# Altium PCB PCB1.PcbDoc
Units mil, origin at the board's own origin, x right, y up, seen from the top; angles counter-clockwise.
Board outline 7070 x 4660 mil, 2 copper layers (Top Layer, Bottom Layer); 52 components, 19 nets, 300 pads, 0 vias.
Unrouted connection lines stored in the file: 39.
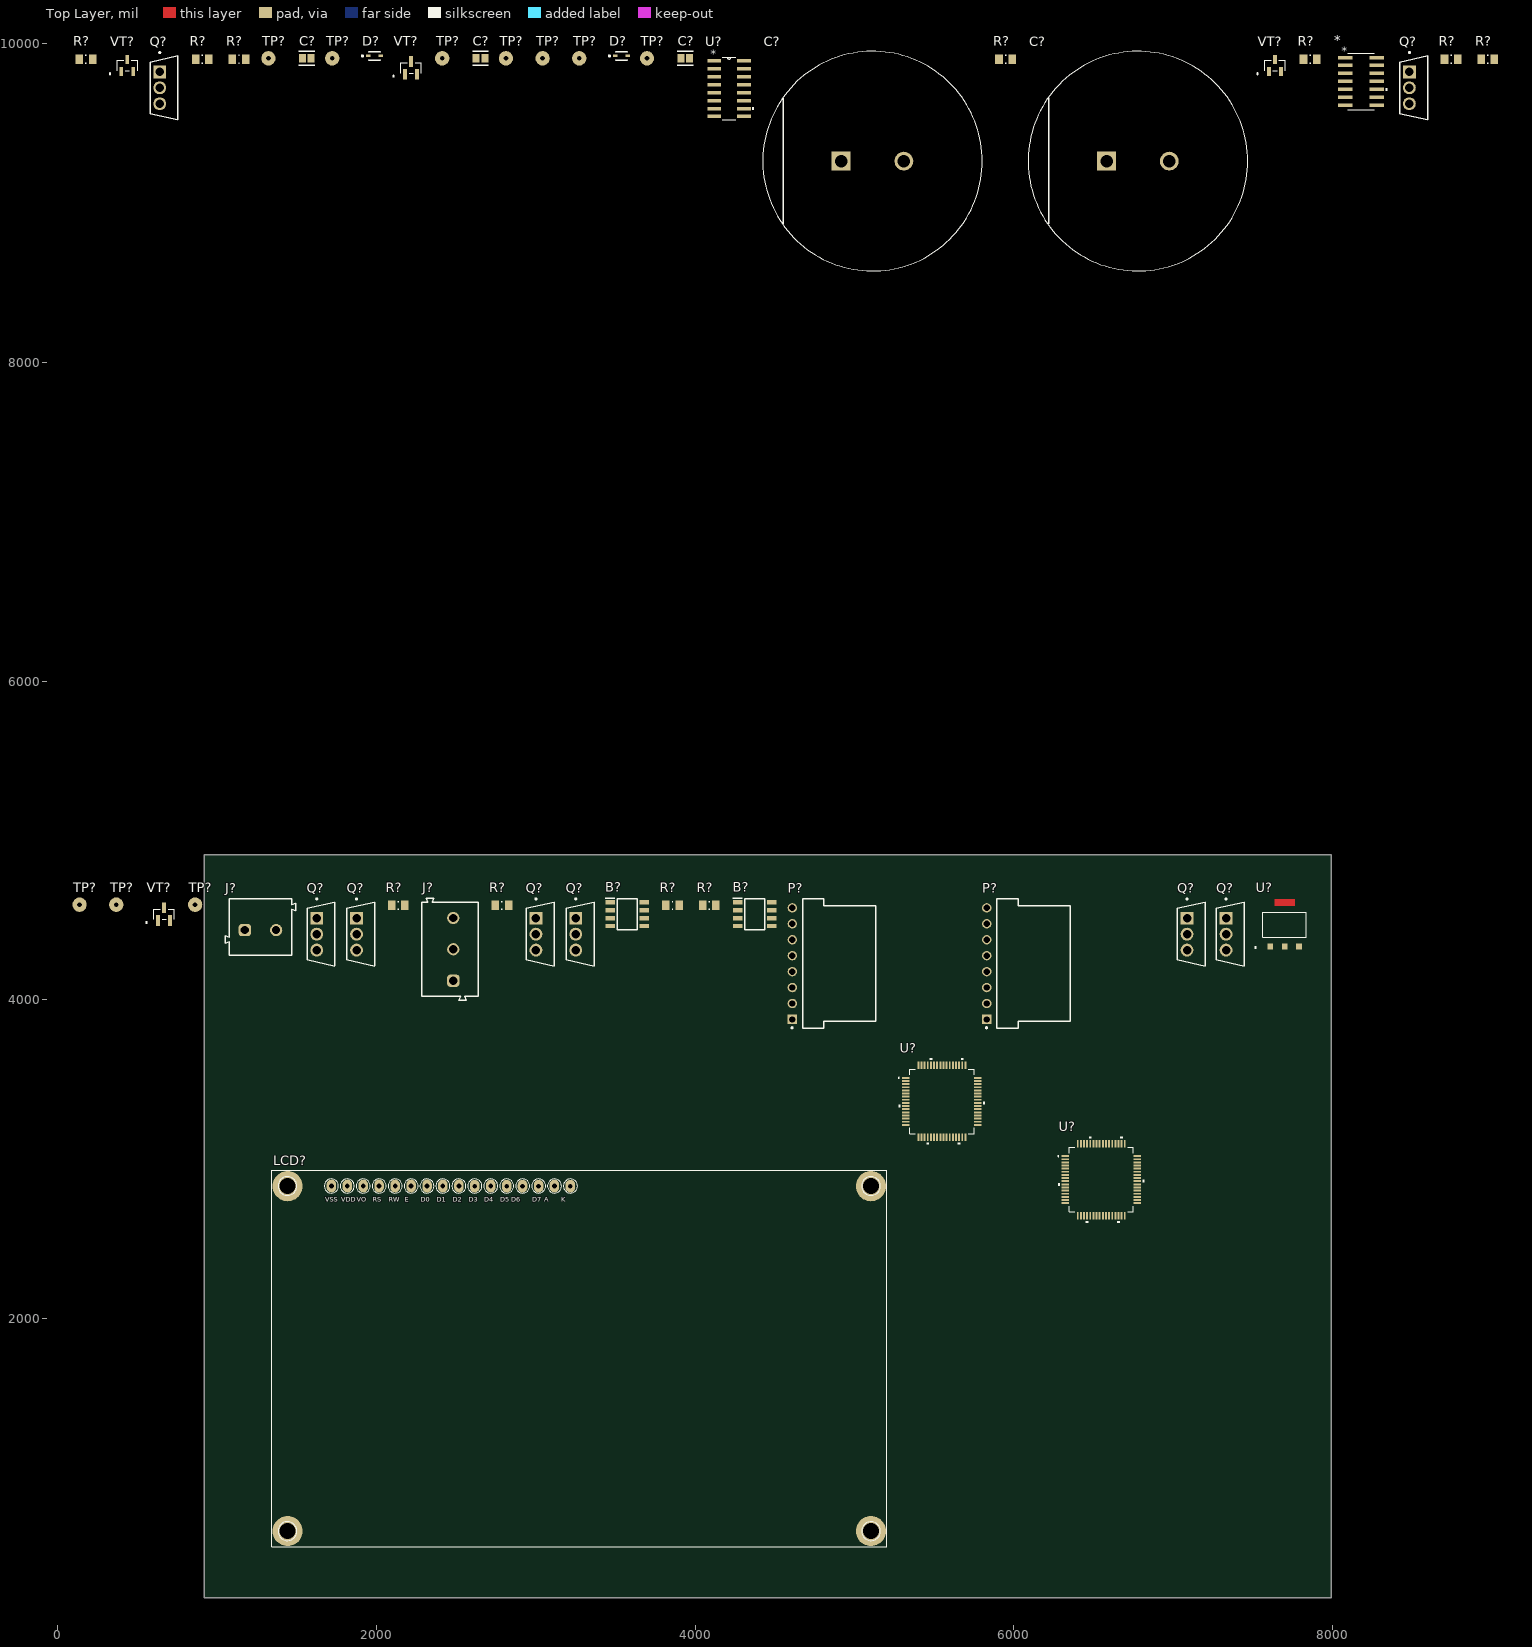
[diagram p0: Top Layer view]
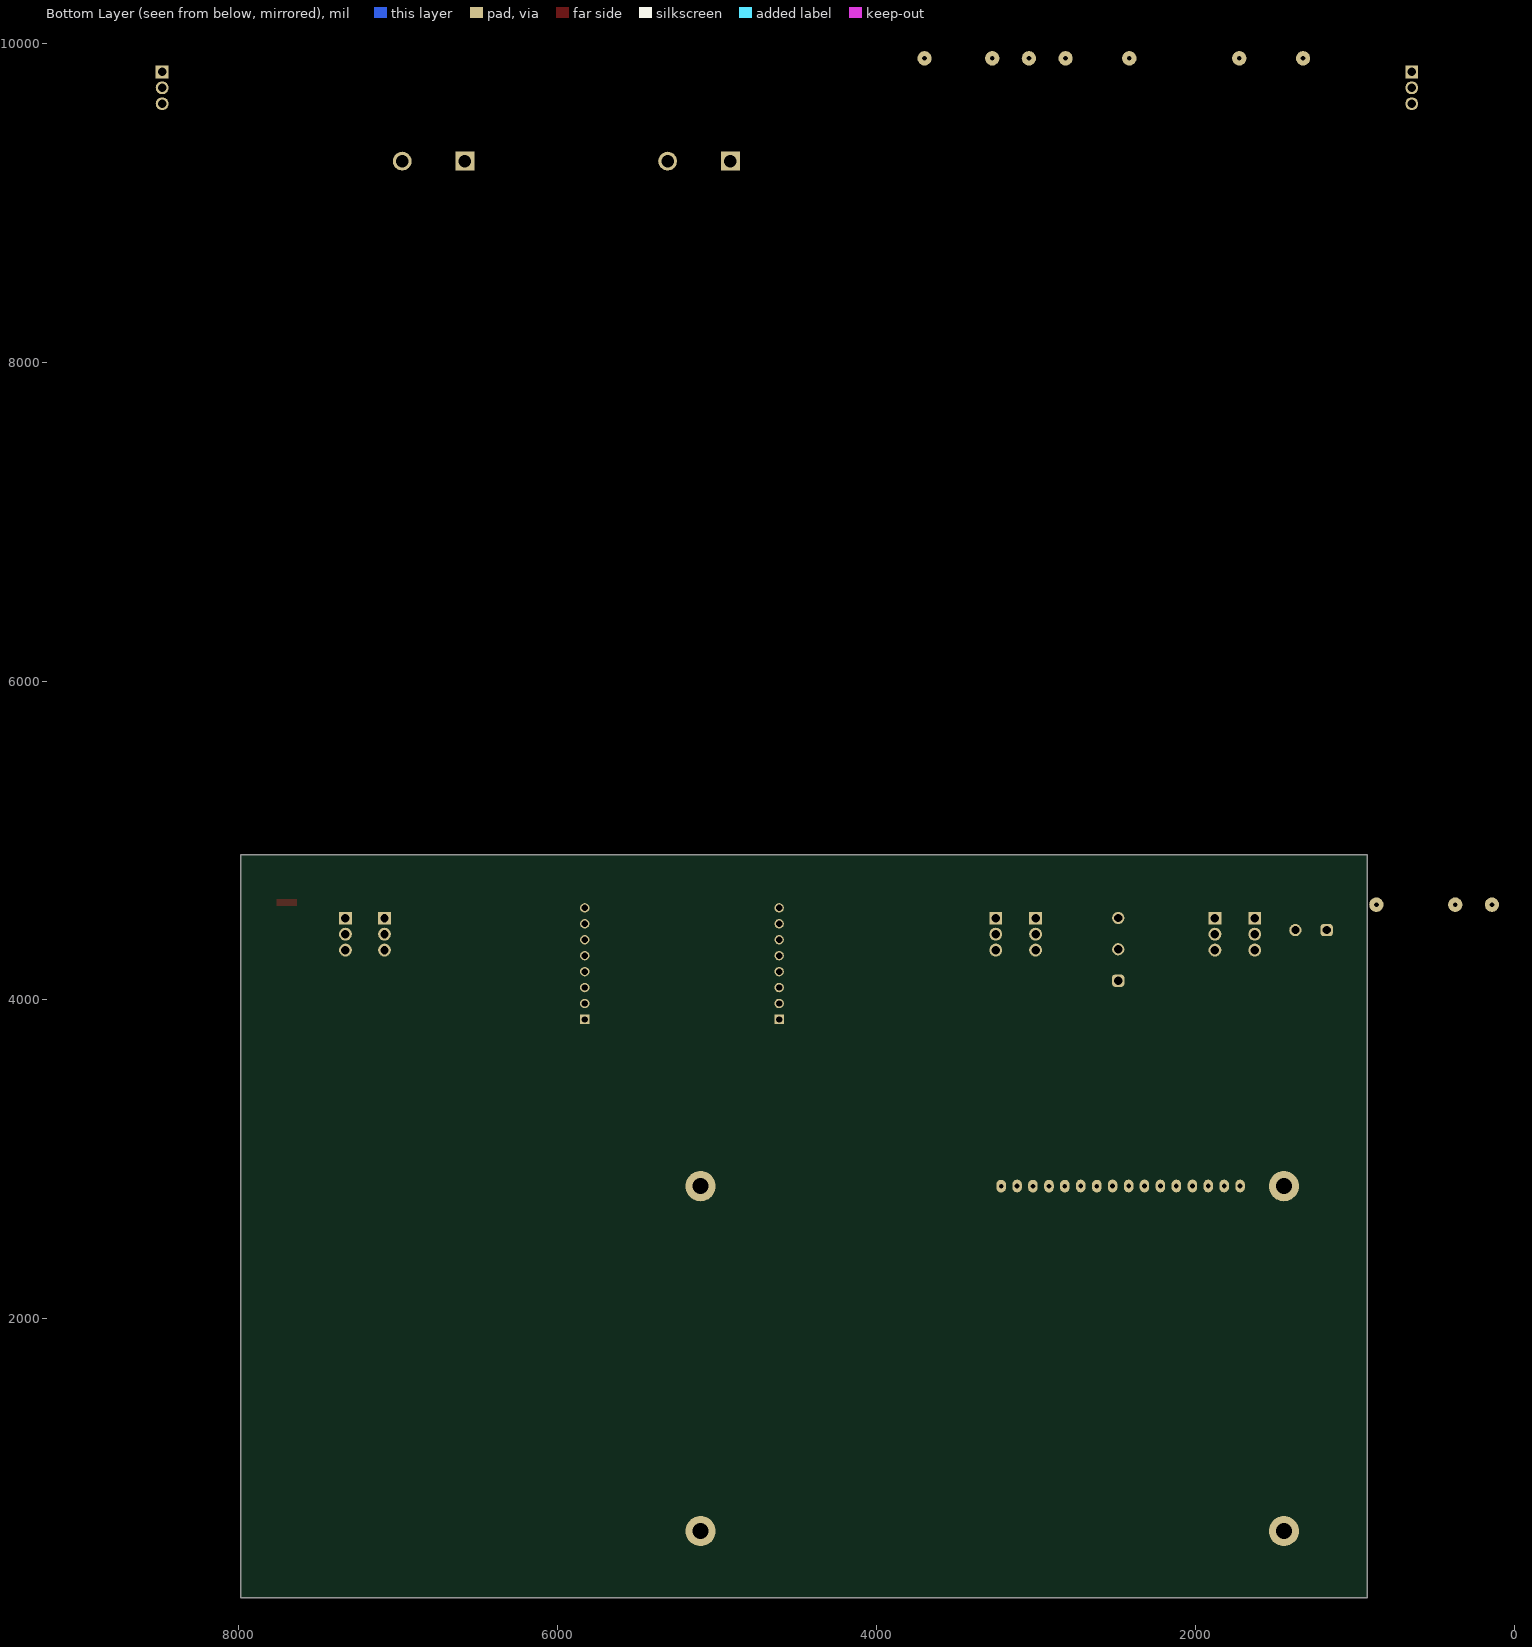
[diagram p1: Bottom Layer view, seen from below]

## Layer stack, top to bottom
Top Solder: solder mask 0.4, Solder Resist, Dk 3.5
Top Layer: signal copper 1.4
Dielectric 1: dielectric 12.6, FR-4, Dk 4.8
Bottom Layer: signal copper 1.4
Bottom Solder: solder mask 0.4, Solder Resist, Dk 3.5

## Board outline
920,250 920,4910 7990,4910 7990,250

## Design rules (kind name [scope] priority, off if disabled: settings)
Clearance [All] p1: gap=10 ignorepadtopadclearanceinfootprint=FALSE except(0: Arc-Hole Track-Hole SMDPad-Hole THPad-Hole Via-Hole Fill-Hole Poly-Hole Region-Hole Text-Hole)
ComponentClearance [All] p1: gap=10 collisioncheckmode=3 verticalgap=-500 showdistances=FALSE
PolygonConnect [All] p1: connectstyle=Relief reliefconductorwidth=10 reliefentries=4 polygonreliefangle="90 Angle" airgapwidth=10
RoomDefinition Logger [InComponentClass('Logger')] p1: confinementstyle=ConfineIn formatcopy=TRUE lockcomponents=FALSE outline 83.62,-247.64 11083.62,-247.64 11083.62,10062.36 83.62,10062.36
RoutingVias [All] p1: holewidth=28 width=50 viastyle="Through Hole" minholewidth=28 minwidth=50 maxholewidth=28 maxwidth=50
SolderMaskExpansion [All] p1: expansion=4 istentingtop=FALSE
Width [All] p1: maxlimit=10 minlimit=10 preferedwidth=10
29 further rules are at their usual default settings.

## Classes and differential pairs
component class Logger: * B? C? D? IC? J? L? LCD? P? Q? R? T? TP? U? VD? VT?

## Components (designator, comment, footprint, x,y, rotation, side; value= is the part's Value field where it differs from the comment)
* "LM324AD_SOIC14" D14-M 8178.62,9762.36 r0 top
B? "IR2101SPBF" SOIC127P600X175-8N 4373.62,4537.36 r0 top
B? "IR2101SPBF" SOIC127P600X175-8N 3573.62,4537.36 r0 top
C? "1000pF" KEMET_C0805C-DN_IPC_C 2653.62,9907.36 r0 top
C? "Cap_Vishay_MAL219390101E3_eec" Vishay_MAL219390101E3_0 6778.62,9262.36 r0 top value=220μF
C? "1uF" KEMET_C0805C-DN_IPC_C 1563.62,9907.36 r0 top
C? "100n" KEMET_C0805C-DN_IPC_C 3938.62,9907.36 r0 top
C? "Cap_Vishay_MAL219390101E3_eec" Vishay_MAL219390101E3_0 5113.62,9262.36 r0 top value=220μF
D? "1N4148W-7-F" Diodes_Inc._SOD323F_MFG 1988.62,9922.36 r0 top
D? "1N4148W-7-F" Diodes_Inc._SOD323F_MFG 3538.62,9922.36 r0 top
J? "691101710002" 691101710002 1273.62,4457.36 r0 top
J? "691101710003" 691101710003 2463.62,4317.36 r90 top
LCD? "LCD" LCD20x4 14178.62,4185.33 r0 top
P? "61900811021" 61900811021 6123.62,4227.36 r90 top
P? "61900811021" 61900811021 4903.62,4227.36 r90 top
Q? "IRF740PBF" Vishay_X15-0364_MFG 8508.62,9722.36 r0 top
Q? "IRF740PBF" Vishay_X15-0364_MFG 668.62,9722.36 r0 top
Q? "IRF740PBF" Vishay_X15-0364_MFG 7113.62,4412.36 r0 top
Q? "IRF740PBF" Vishay_X15-0364_MFG 3028.62,4412.36 r0 top
Q? "IRF740PBF" Vishay_X15-0364_MFG 1653.62,4412.36 r0 top
Q? "IRF740PBF" Vishay_X15-0364_MFG 3278.62,4412.36 r0 top
Q? "IRF740PBF" Vishay_X15-0364_MFG 7358.62,4412.36 r0 top
Q? "IRF740PBF" Vishay_X15-0364_MFG 1903.62,4412.36 r0 top
R? "22" Vishay_CRCW0805-e3_IPC_A 8973.62,9902.36 r0 top
R? "10k" Vishay_CRCW0805-e3_IPC_A 178.62,9902.36 r0 top
R? "22" Vishay_CRCW0805-e3_IPC_A 1138.62,9902.36 r0 top
R? "22" Vishay_CRCW0805-e3_IPC_A 908.62,9902.36 r0 top
R? "10k" Vishay_CRCW0805-e3_IPC_A 5948.62,9902.36 r0 top
R? "10" Vishay_CRCW0805-e3_IPC_A 2788.62,4592.36 r0 top
R? "10" Vishay_CRCW0805-e3_IPC_A 2138.62,4592.36 r0 top
R? "22" Vishay_CRCW0805-e3_IPC_A 8743.62,9902.36 r0 top
R? "10" Vishay_CRCW0805-e3_IPC_A 4088.62,4592.36 r0 top
R? "10" Vishay_CRCW0805-e3_IPC_A 3858.62,4592.36 r0 top
R? "22" Vishay_CRCW0805-e3_IPC_A 7858.62,9902.36 r0 top
TP? "Test_Point_PCB" Test_Point 138.62,4597.36 r0 top
TP? "Test_Point_PCB" Test_Point 3043.62,9907.36 r0 top
TP? "Test_Point_PCB" Test_Point 368.62,4597.36 r0 top
TP? "Test_Point_PCB" Test_Point 1723.62,9907.36 r0 top
TP? "Test_Point_PCB" Test_Point 3273.62,9907.36 r0 top
TP? "Test_Point_PCB" Test_Point 2413.62,9907.36 r0 top
TP? "Test_Point_PCB" Test_Point 3698.62,9907.36 r0 top
TP? "Test_Point_PCB" Test_Point 1323.62,9907.36 r0 top
TP? "Test_Point_PCB" Test_Point 863.62,4597.36 r0 top
TP? "Test_Point_PCB" Test_Point 2813.62,9907.36 r0 top
U? "LT1117CST-5#PBF" SOT-223_ST_LIT 7698.62,4472.36 r0 top
U? "STM32F405RGT6" LQFP64-10x10mm 6548.62,2872.36 r0 top
U? "STM32F405RGT6" LQFP64-10x10mm 5548.62,3363.58 r0 top
U? "TL494ID" D16 4213.62,9717.36 r0 top
VT? "MMBT2907" SOT-23_ONS 7638.62,9862.36 r0 top
VT? "PMBTA06" SOT-23_ONS-M 2218.62,9847.36 r0 top
VT? "MMBT2907" SOT-23_ONS 438.62,9862.36 r0 top
VT? "PMBTA06" SOT-23_ONS-M 668.62,4537.36 r0 top

## Footprints (in the part's own frame and the unit in brackets; to place one, negate y for a bottom-side part, rotate by r counter-clockwise, add the part's x,y. Pads: shape width x height; smd on the part's side, far side on the other; paste and mask are expansions set on the pad)
61900811021 [mm] "2.54mm Male Left Angled Header Bottom Locking, 8p"
  rect 1.5x1.5 hole 1: 1(-8.89,7.45)
  round 1.5 hole 1: 2(-6.35,7.45) 3(-3.81,7.45) 4(-1.27,7.45) 5(1.27,7.45) 6(3.81,7.45) 7(6.35,7.45) 8(8.89,7.45)
  silkscreen extent -10.34,-5.82 10.33,7.62, body extent -10.17,-5.75 10.15,7.77, height 5.83
691101710002 [mm] "5,00mm - modular - blue - Horizontal entry with pressure clamp - 12,6mm height - 02p"
  rrect50% 1.95x1.95 hole 1.3: 1(-2.5,-0.5)
  round 1.95 hole 1.3: 2(2.5,-0.5)
  silkscreen extent -5.6,-4.5 5.6,4.5, body extent -5.6,-4.5 5.6,4.5, height 12.65
691101710003 [mm] "5,00mm - modular - blue - Horizontal entry with pressure clamp - 12,6mm height - 03p"
  rrect50% 1.95x1.95 hole 1.3: 1(-5,-0.5)
  round 1.95 hole 1.3: 2(0,-0.5) 3(5,-0.5)
  silkscreen extent -8.1,-4.5 8.1,4.5, body extent -8.1,-4.5 8.1,4.5, height 12.65
D14-M [mm]
  rect 2.27x0.558 smd paste+0 mask+0: 1(-2.514,3.81) 2(-2.514,2.54) 3(-2.514,1.27) 4(-2.514,0) 5(-2.514,-1.27) 6(-2.514,-2.54) 7(-2.514,-3.81) 8(2.514,-3.81) 9(2.514,-2.54) 10(2.514,-1.27) 11(2.514,0) 12(2.514,1.27) 13(2.514,2.54) 14(2.514,3.81)
  silkscreen extent -2.12,-4.5 4.16,4.5, body extent -3.1,-4.37 3.1,4.37, height 1.76
D16 [mil]
  rect 86x22 smd: 1(-93,175) 2(-93,125) 3(-93,75) 4(-93,25) 5(-93,-25) 6(-93,-75) 7(-93,-125) 8(-93,-175) 9(93,-175) 10(93,-125) 11(93,-75) 12(93,-25) 13(93,25) 14(93,75) 15(93,125) 16(93,175)
  silkscreen extent -43,-197 156,197, body extent -122,-197 122,197, height 69
Diodes_Inc._SOD323F_MFG [mm]
  rect 0.71x0.403 smd paste+0 mask+0: 1(-0.995,0) 2(0.995,0)
  silkscreen extent -2.05,-0.67 0.9,0.67, body extent -1.45,-0.77 1.45,0.77, height 0.25
KEMET_C0805C-DN_IPC_C [mil]
  rect 43.49x53.39 smd paste+0 mask+0: 1(-27.59,0) 2(27.59,0)
  silkscreen extent -49,-44 49,44, body extent -53,-32 53,32, height 10
LCD20x4 [mil]
  oval 60x80 hole 30: 1(-12460,-1353) 2(-12360,-1353) 3(-12260,-1353) 4(-12161,-1353) 5(-12060,-1353) 6(-11960,-1353) 7(-11860,-1353) 8(-11761,-1353) 9(-11660,-1353) 10(-11561,-1354) 11(-11460,-1353) 12(-11360,-1354) 13(-11261,-1354) 14(-11160,-1354) 15(-11061,-1353) 16(-10961,-1354)
  round 190 hole 100: GND(-12735,-3518) GND(-12735,-1354) GND(-9075,-3518) GND(-9075,-1354)
  silkscreen extent -12834,-3617 -8976,-1255, body extent -12834,-3617 -8976,-1255, height 705
LQFP64-10x10mm [mil]
  rect 47x12 smd paste+0 mask+0: 1(-226.38,147.64) 2(-226.38,127.95) 3(-226.38,108.27) 4(-226.38,88.58) 5(-226.38,68.9) 6(-226.38,49.21) 7(-226.38,29.53) 8(-226.38,9.84) 9(-226.38,-9.84) 10(-226.38,-29.53) 11(-226.38,-49.21) 12(-226.38,-68.9) 13(-226.38,-88.58) 14(-226.38,-108.27) 15(-226.38,-127.95) 16(-226.38,-147.64) 33(226.38,-147.64) 34(226.38,-127.95) 35(226.38,-108.27) 36(226.38,-88.58) 37(226.38,-68.9) 38(226.38,-49.21) 39(226.38,-29.53) 40(226.38,-9.84) 41(226.38,9.84) 42(226.38,29.53) 43(226.38,49.21) 44(226.38,68.9) 45(226.38,88.58) 46(226.38,108.27) 47(226.38,127.95) 48(226.38,147.64)
  rect 12x47 smd paste+0 mask+0: 17(-147.64,-226.38) 18(-127.95,-226.38) 19(-108.27,-226.38) 20(-88.58,-226.38) 21(-68.9,-226.38) 22(-49.21,-226.38) 23(-29.53,-226.38) 24(-9.84,-226.38) 25(9.84,-226.38) 26(29.53,-226.38) 27(49.21,-226.38) 28(68.9,-226.38) 29(88.58,-226.38) 30(108.27,-226.38) 31(127.95,-226.38) 32(147.64,-226.38) 49(147.64,226.38) 50(127.95,226.38) 51(108.27,226.38) 52(88.58,226.38) 53(68.9,226.38) 54(49.21,226.38) 55(29.53,226.38) 56(9.84,226.38) 57(-9.84,226.38) 58(-29.53,226.38) 59(-49.21,226.38) 60(-68.9,226.38) 61(-88.58,226.38) 62(-108.27,226.38) 63(-127.95,226.38) 64(-147.64,226.38)
  silkscreen extent -273,-270 270,270, body extent -236,-236 236,236, height 63
SOIC127P600X175-8N [mm]
  rect 1.525x0.65 smd: 1(-2.712,1.905) 2(-2.712,0.635) 3(-2.712,-0.635) 4(-2.712,-1.905) 5(2.712,-1.905) 6(2.712,-0.635) 7(2.712,0.635) 8(2.712,1.905)
  silkscreen extent -3.47,-2.45 1.6,2.58, body extent -3,-2.45 3,2.45, height 1.75
SOT-23_ONS [mil]
  rect 22.36x55.56 smd paste+0 mask+0: 1(-37.5,-38) 2(37.5,-38) 3(0,38)
  silkscreen extent -115,-57 65,32, body extent -60,-52 60,52, height 44
SOT-23_ONS-M [mil]
  rect 23.94x67.37 smd paste+0 mask+0: 1(-37.5,-39.97) 2(37.5,-39.97) 3(0,39.97)
  silkscreen extent -115,-57 65,32, body extent -60,-52 60,52, height 44
SOT-223_ST_LIT [mil]
  rect 35x40 smd paste+0 mask+0: 1(-90.5,-137.5) 2(0,-137.5) 3(90.5,-137.5)
  Top Layer region: 63,117.5 63,157.5 -63,157.5 -63,117.5
  silkscreen extent -187,-148 137,78, body extent -132,-144 132,144, height 71
Test_Point [mil]
  round 90 hole 30 unplated paste+4 mask+4: 1(0,0)
Vishay_CRCW0805-e3_IPC_A [mil]
  rect 47.5x59.38 smd paste+0 mask+0: 1(-41.37,0) 2(41.37,0)
  silkscreen extent -3,-25 3,25, body extent -85,-49 85,49, height 10
Vishay_MAL219390101E3_0 [mm]
  rect 3x3 hole 2 paste-1000 mask+0: 1(-5,0)
  round 3 hole 2 paste-1000 mask+0: 2(5,0)
  silkscreen extent -17.5,-17.5 17.5,17.5
Vishay_X15-0364_MFG [mm]
  rect 2.05x2.05 hole 1.35 paste-1000 mask+0: 1(-0.685,2.54)
  round 2.05 hole 1.35 paste-1000 mask+0: 2(-0.685,0) 3(-0.685,-2.54)
  silkscreen extent -2.22,-5.12 2.22,5.74, body extent -2.42,-5.36 2.42,5.36, height 0.25

## Part data
B? B?: "Gate Drivers HI LO SIDE DRVR 600V 130mA 50ns", Manufacturer_Name=Infineon, Mouser Part Number=942-IR2101SPBF, Arrow Part Number=IR2101SPBF, Arrow Price/Stock=https://www.arrow.com/en/products/ir2101spbf/infineon-technologies-ag?region=europe, Datasheet Link=https://www.infineon.com/cms/en/product/power/gate-driver-ics/?, Geometry.Height=1.75mm, Manufacturer_Part_Number=IR2101SPBF, Mouser Price/Stock=https://www.mouser.co.uk/ProductDetail/Infineon-Technologies/IR2101SPBF?qs=dQmlx5f5cRK0Gls2VgsKEQ%3D%3D
C? C?: library part C0805C104J4RACTU, "100pF"
C? C?: "CAP 220µF 500V Aluminum Capacitors Radial, Can - Snap-In 900 mOhm 6000 Hrs @ 105°C", Capacitance=220μF, Digikey Part Number=4569PHBK-ND, Manufacturer=Vishay, Mouser Part Number=594-MAL219390101E3, Package=RADIAL, Part Number=MAL219390101E3, Temperature="-25°C to +105°C", Temperature Range High=+105°C, Temperature Range Low=-25°C, Tolerance=±20%, Voltage=500V, ComponentLink1Description=Upverter, ComponentLink1URL=https://upverter.com/upn/revision/6e31225a6b8864ee/, ComponentLink2Description=Datasheet, ComponentLink2URL=https://upverter.com/datasheet/b964967ce70ad5180ed35a6206109933e2b1bb55.pdf, Digikey Description="CAP 220µF 500V Aluminum Capacitors Radial, Can - Snap-In 900 mOhm 6000 Hrs @ 105°C", helpURL=https://upverter.com/upn/revision/6e31225a6b8864ee/, Ipc Land Pattern Name=CAPRD1000W120D3500H3000, Lead Free=yes, Mounting Type="Through Hole", Price=7.89477511745, RoHS=TRUE, Supplier 1=Digi-Key, Supplier 2=Mouser, Supplier Part Number 1=4569PHBK-ND, Supplier Part Number 2=594-MAL219390101E3
C?: library part C0805C104J4RACTU
J?: "WR-TBL Series 101 Horizontal Entry Modular, Through Hole, pitch 5mm, 2p", Manufacturer="Wurth Elektronik", Operating Temperature Max=105°C, Operating Temperature Min=-40°C, Rated Current=16A, Working Voltage=250V, Application="Pressure Clamp", Category="Terminal Blocks", ComponentLink1Description="Manufacturer Link", ComponentLink1URL=https://www.we-online.com/redexpert/article/691101710002?ad, ComponentLink2Description=Datasheet, ComponentLink2URL=https://www.we-online.com/redexpert/spec/691101710002?ad, Manufacturer Part Number=691101710002, Match Code=WR-TBL, Modularity=Yes, Mount="Through Hole", Orientation=Horizontal, Packaging=Box, PCB/Cable/Panel=PCB, Pin Number=2, Pitch=5mm
J?: "WR-TBL Series 101 Horizontal Entry Modular, Through Hole, pitch 5mm, 3p", Manufacturer="Wurth Elektronik", Operating Temperature Max=105°C, Operating Temperature Min=-40°C, Rated Current=16A, Working Voltage=250V, Application="Pressure Clamp", Category="Terminal Blocks", ComponentLink1Description="Manufacturer Link", ComponentLink1URL=https://www.we-online.com/redexpert/article/691101710003?ad, ComponentLink2Description=Datasheet, ComponentLink2URL=https://www.we-online.com/redexpert/spec/691101710003?ad, Manufacturer Part Number=691101710003, Match Code=WR-TBL, Modularity=Yes, Mount="Through Hole", Orientation=Horizontal, Packaging=Box, PCB/Cable/Panel=PCB, Pin Number=3, Pitch=5mm
LCD?: "20x4"
P? P?: "WR-WTB THT Male Left Angled Bottom Locking Header, pitch 2.54mm, 8p", Contact Resistance=20mOhm, Operating Temperature="-40 to +105degC", Rated Current=3A, Withstanding Voltage=1000VAC, Working Voltage=250VAC, ComponentLink1Description=Manufacturer, ComponentLink1URL=http://www.we-online.de, ComponentLink2Description=Datasheet, ComponentLink2URL=https://www.we-online.com/catalog/datasheet/61900811021.pdf, Gender=Male, Mounting Technology=THT, Packaging=Bag, Part Number=61900811021, Pin Number=8, Pitch=2.54mm, Published Date="January 2020", Publisher="Wurth Elektronik", Type="Right Angled Bottom Locking"
R? R? R? R? R? R? R? R? R? R? R?: library part CRCW08050000Z0EA
TP? TP? TP? TP? TP? TP? TP? TP? TP? TP?: library part TP_PCB?, "Test_Point"
U?: "No Description Available", Mfr_Name="Analog Devices Inc", Copyright="Copyright (C) 2022 Ultra Librarian. All rights reserved.", Manufacturer_Part_Number=LT1117CST-5#PBF, RefDes=RefDes, Type=DEV
U? U?: "No Description Available", Mfr_Name=STMicroelectronics, Copyright="Copyright (C) 2022 Ultra Librarian. All rights reserved.", Manufacturer_Part_Number=STM32F405RGT6, RefDes=RefDes, Type=DEV
U?: "Pulse-Width-Modulation Control Circuit with Voltage Control, 45 % Duty Cycle, -40 to +85 degC, 16-pin SOIC (D), Green (RoHS & no Sb/Br)", Alternate Manufacturer="Texas Instruments", Alternate PartNumber=Equivalent, Frequency(Max)(kHz)=300, Rating=Military, Supplier Part Number 1=296-10193-5-ND, Code_JEDEC=MS-012AC, ComponentLink1Description=Datasheet, ComponentLink1URL=http://www.ti.com/general/docs/lit/getliterature.tsp?genericPartNumber=TL494&fileType=pdf, Control Method=Voltage, DatasheetVersion=SLVS074E, Duty Cycle(Max)(%)=45, Eco-Plan="Green (RoHS & no Sb/Br)", Manufacturer="Texas Instruments", MountType=SMT, PackageDescription="16-Pin Plastic Small Outline Integrated Circuit, 9.9 x 3.9 mm, Pitch 1.27 mm Pitch", PackageReference=D0016A, PackageVersion="revM, Jun-2011", PartNumber=TL494ID, Regulated Outputs(#)=2, SubFamily="PWM Controller", Supplier 1=Digi-Key, Supplier 2=Farnell, Supplier 3=Newark, Supplier 4=Mouser, Supplier Part Number 2=1491489, Supplier Part Number 3=52F2762, Supplier Part Number 4=595-TL494ID, Topology="Boost, Buck, Flyback, Forward, Full-Bridge, Half-Bridge, Push-Pull"
VT? VT?: library part MMBT2907ALT1G, "No Description Available", Mfr_Name=onsemi, Copyright="Copyright (C) 2022 Ultra Librarian. All rights reserved.", Manufacturer_Part_Number=MMBT2907ALT1G, RefDes=RefDes, Type=DEV

## Nets (pads, with @x,y where several pads share a name; then routed paths per layer and width w, separated by ;. In a path a pad name is that pad's centre, name@x,y a point inside that pad or via, vN(x,y) a via of type N, cw(c..) or ccw(c..) an arc to the next point about the centre after c; other vN are vias at no path point)
+12: U?.8@4120.62,9542.36 U?.11@4306.62,9642.36 U?.12@4306.62,9692.36 VT?.3@668.62,4577.33 VT?.3@2218.62,9887.33
GND: C?.1@1536.03,9907.36 C?.1@2626.03,9907.36 Q?.3@1626.65,4312.36 Q?.3@1876.65,4312.36 R?.1@137.25,9902.36 R?.1@5907.25,9902.36 U?.1@4120.62,9892.36 U?.7@4120.62,9592.36 U?.16@4306.62,9892.36 VT?.3@438.62,9900.36 VT?.3@7638.62,9900.36
Net*_1: *.1 D?.2@3577.8,9922.36
Net*_7: *.7 D?.2@2027.8,9922.36
NetB?_5: B?.5@4480.39,4462.36 R?.2@3899.99,4592.36
NetB?_6: B?.6@3680.39,4512.36 J?.1@2483.31,4120.5 Q?.2@1876.65,4412.36 Q?.3@3001.65,4312.36
NetB?_7: B?.7@3680.39,4562.36 R?.2@2829.99,4592.36
NetC?_1: C?.1@3911.03,9907.36 R?.2@7899.99,9902.36
NetC?_2: C?.2@5310.47,9262.36
NetD?_1: D?.1 TP?.1@3043.62,9907.36 U?.4@4120.62,9742.36
NetQ?_1: Q?.1@641.65,9822.36 R?.1@1097.25,9902.36 TP?.1@2413.62,9907.36
NetQ?_2: Q?.2@8481.65,9722.36 R?.1@7817.25,9902.36 TP?.1@863.62,4597.36
NetQ?_3: Q?.3@641.65,9622.36 Q?.3@8481.65,9622.36 R?.2@9014.99,9902.36
NetR?_1: R?.1@8932.25,9902.36 U?.6@4120.62,9642.36
NetR?_2: R?.2@949.99,9902.36 TP?.1@2813.62,9907.36 U?.10@4306.62,9592.36
NetT?_6: 
NetT?_10: 
"VCC +320": Q?.2@3001.65,4412.36 Q?.2@3251.65,4412.36
Vref: C?.2@1591.21,9907.36 U?.2@4120.62,9842.36 U?.13@4306.62,9742.36 U?.14@4306.62,9792.36 U?.15@4306.62,9842.36
pads on no net: *.2 *.3 *.4 *.5 *.6 *.8 *.9 *.10 *.11 *.12 *.13 *.14 B?.1 B?.2 B?.3 B?.4 B?.5@3680.39,4462.36 B?.6@4480.39,4512.36 B?.7@4480.39,4562.36 B?.8 C?.1@4916.77,9262.36 C?.1@6581.77,9262.36 C?.2@2681.21,9907.36 C?.2@3966.21,9907.36 C?.2@6975.47,9262.36 J?.1@1175.19,4437.68 J?.2 J?.3 LCD?.1 LCD?.2 LCD?.3 LCD?.4 LCD?.5 LCD?.6 LCD?.7 LCD?.8 LCD?.9 LCD?.10 LCD?.11 LCD?.12 LCD?.13 LCD?.14 LCD?.15 LCD?.16 LCD?.GND P?.1 P?.2 P?.3 P?.4 P?.5 P?.6 P?.7 P?.8 Q?.1@1626.65,4512.36 Q?.1@1876.65,4512.36 Q?.1@3001.65,4512.36 Q?.1@3251.65,4512.36 Q?.1@7086.65,4512.36 Q?.1@7331.65,4512.36 Q?.1@8481.65,9822.36 Q?.2@641.65,9722.36 Q?.2@1626.65,4412.36 Q?.2@7086.65,4412.36 Q?.2@7331.65,4412.36 Q?.3@3251.65,4312.36 Q?.3@7086.65,4312.36 Q?.3@7331.65,4312.36 R?.1@867.25,9902.36 R?.1@2097.25,4592.36 R?.1@2747.25,4592.36 R?.1@3817.25,4592.36 R?.1@4047.25,4592.36 R?.1@8702.25,9902.36 R?.2@219.99,9902.36 R?.2@1179.99,9902.36 R?.2@2179.99,4592.36 R?.2@4129.99,4592.36 R?.2@5989.99,9902.36 R?.2@8784.99,9902.36 TP?.1@138.62,4597.36 TP?.1@368.62,4597.36 TP?.1@1323.62,9907.36 TP?.1@1723.62,9907.36 TP?.1@3273.62,9907.36 TP?.1@3698.62,9907.36 U?.1@5322.24,3511.22 U?.1@6322.24,3020 U?.1@7608.12,4334.86 U?.2@5322.24,3491.54 U?.2@6322.24,3000.32 U?.2@7698.62,4334.86 U?.3 U?.4@5322.24,3452.17 U?.4@6322.24,2960.94 U?.5 U?.6@5322.24,3412.8 U?.6@6322.24,2921.57 U?.7@5322.24,3393.11 U?.7@6322.24,2901.89 U?.8@5322.24,3373.43 U?.8@6322.24,2882.2 U?.9 U?.10@5322.24,3334.06 U?.10@6322.24,2842.83 U?.11@5322.24,3314.37 U?.11@6322.24,2823.15 U?.12@5322.24,3294.69 U?.12@6322.24,2803.46 U?.13@5322.24,3275 U?.13@6322.24,2783.78 U?.14@5322.24,3255.32 U?.14@6322.24,2764.09 U?.15@5322.24,3235.63 U?.15@6322.24,2744.41 U?.16@5322.24,3215.94 U?.16@6322.24,2724.72 U?.17 U?.18 U?.19 U?.20 U?.21 U?.22 U?.23 U?.24 U?.25 U?.26 U?.27 U?.28 U?.29 U?.30 U?.31 U?.32 U?.33 U?.34 U?.35 U?.36 U?.37 U?.38 U?.39 U?.40 U?.41 U?.42 U?.43 U?.44 U?.45 U?.46 U?.47 U?.48 U?.49 U?.50 U?.51 U?.52 U?.53 U?.54 U?.55 U?.56 U?.57 U?.58 U?.59 U?.60 U?.61 U?.62 U?.63 U?.64 VT?.1 VT?.2

## Silkscreen, mask and mechanical layers (free items; w line width, h text height)
Mechanical 1:
  the board outline again, w10

## Text inside footprints (layer, text, board x,y; h text height)
LCD?: Top Overlay "K" at 3160.65,2733.36 h28.7; Top Overlay "A" at 3053.65,2733.36 h28.7; Top Overlay "D7" at 2978.94,2732.91 h28.7; Top Overlay "D6" at 2846.62,2734.33 h28.7; Top Overlay "D5" at 2778.94,2732.91 h28.7; Top Overlay "D4" at 2678.94,2732.91 h28.7; Top Overlay "D3" at 2578.94,2732.91 h28.7; Top Overlay "D2" at 2478.94,2732.91 h28.7; Top Overlay "D1" at 2378.91,2732.88 h28.7; Top Overlay "D0" at 2278.94,2732.91 h28.7; Top Overlay "E" at 2178.94,2732.91 h28.7; Top Overlay "RW" at 2078.94,2732.91 h28.7; Top Overlay "RS" at 1978.94,2732.91 h28.7; Top Overlay "VO" at 1878.94,2732.91 h28.7; Top Overlay "VDD" at 1778.94,2732.91 h28.7; Top Overlay "VSS" at 1678.94,2732.91 h28.7; Top Overlay "Designator1" at 5888.65,-224.64 h60; Top Overlay "Comment" at 5888.65,-224.64 h60
U?: Mechanical 13 "*" at 4098.12,9909.36 h50; Top Overlay "*" at 4098.12,9909.36 h50